# Altium PCB WX0.012.610PCB-4.2.PcbDoc (part 2 of 2)
Units mm, origin at the board's own origin, x right, y up, seen from the top; angles counter-clockwise.
Board outline 119 x 43 mm, 2 copper layers (Top Layer, Bottom Layer), stack 0.325 mm thick; 149 components, 114 nets, 503 pads, 393 vias.
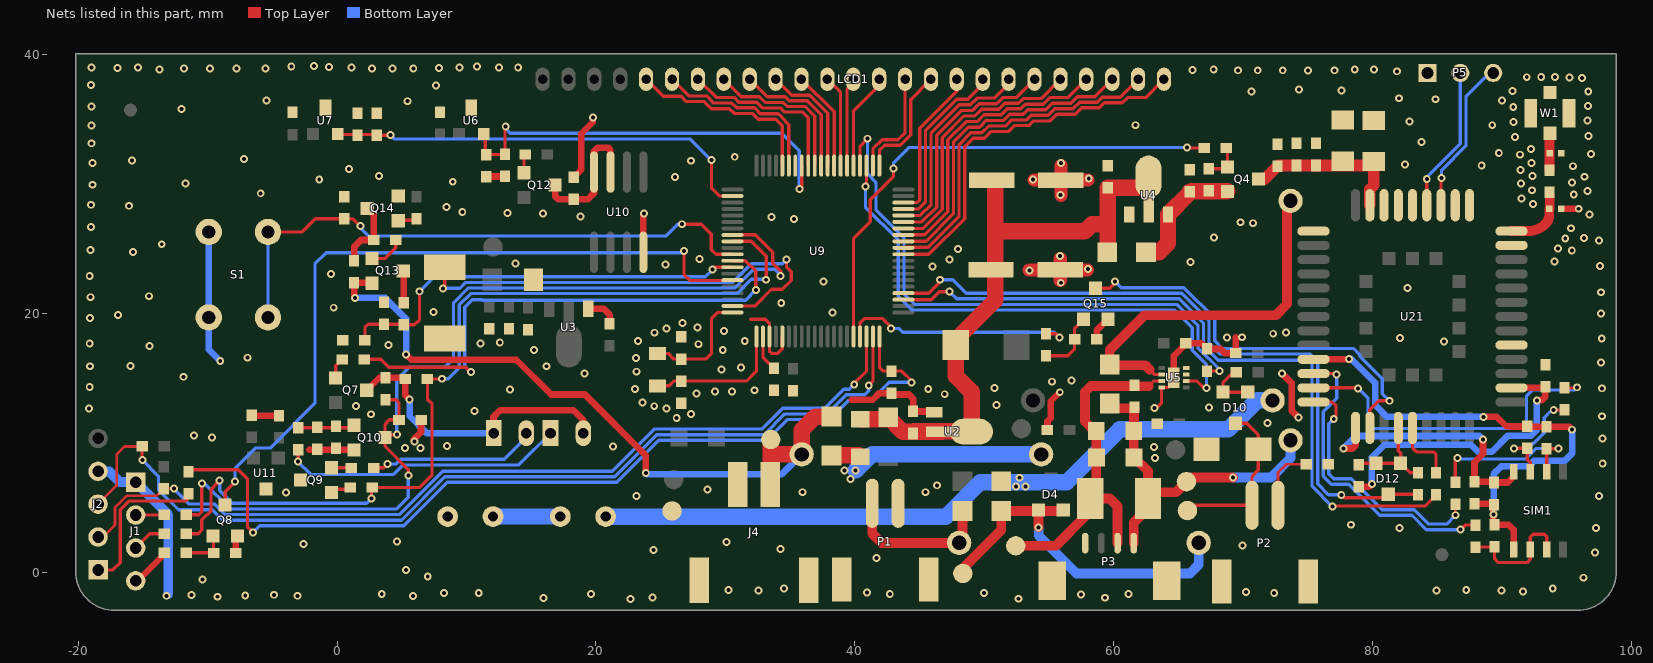
[diagram p2: the nets of this part, all layers, seen from the top]

## Via types
v1: diameter 0.61, hole 0.305, Top Layer to Bottom Layer, tented both sides, 393 vias

## Nets (pads, with @x,y where several pads share a name; then routed paths per layer and width w, separated by ;. In a path a pad name is that pad's centre, name@x,y a point inside that pad or via, vN(x,y) a via of type N, cw(c..) or ccw(c..) an arc to the next point about the centre after c; other vN are vias at no path point) (continued)
GND: C1.1 C2.1 C3.2 C4.2 C5.2 C7.2 C8.2 C9.2 C10.2 C14.2 C16.2 C17.2 C18.2 C22.1 C23.1 C24.2 C25.2 C26.2 C27.2 C28.2 C29.2 C30.2 C31.2 C32.2 C36.2 C37.2 C38.2 C39.1 C40.2 C41.1 C42.2 C43.2 C44.2 C47.2 C48.2 C49.2 C50.2 C51.1 C54.2 C55.2 C56.2 C57.2 FB2.1 J1.1 J2.4 J4.2 J4.3 J4.4 P1.1 P1.3 P1.4 P2.3 P2.4 P3.1 P3.5 P3.6 P5.1 Q8.2 Q9.3 Q10.2 Q14.2 Q15.2 R38.1 R41.1 R56.2 R58.2 S1.2 S2.2 TP5.1 TVS2.1 U2.1 U3.1 U4.1 U5.4 U5.9 U6.3 U7.3 U9.63 U9.65 U10.4 U11.3 U21.1 U21.27 U21.34 U21.36 U21.37 U21.40 U21.41 W1.2 | length 92.1
  Top Layer w0.254: 31.966,19.558 33.084,19.558 33.398,19.244 U9.63@33.398,18.224 33.398,17.085 33.567,16.916 34.049,16.916 34.398,17.265 U9.65@34.398,18.224 ; v1(63.144,12.7) 63.276,12.7 63.693,13.117 U5.4@63.693,14.287 64.198,14.287 64.643,14.732 U5.9@64.643,15.037
  Top Layer w0.508: R38.1@-7.816,1.498 Q8.2@-7.816,2.691 ; C49.2@-6.559,12.109 C48.2@-4.491,12.109 ; -2.157,9.464 Q10.2@1.315,9.464 ; v1(5.994,10.109) 5.994,10.185 5.918,10.262 6.49,10.833 C26.2@6.49,11.786 ; C30.2@11.538,30.584 C50.2@12.982,30.584 ; C36.2@18.288,30.518 18.872,31.103 18.872,33.884 19.761,34.773 v1(19.761,35.128) ; U3.1@19.407,20.382 20.588,20.382 21.057,19.914 C3.2@21.057,19.215 ; U10.4@23.661,24.727 v1@23.661,27.571 ; 39.776,13.335 41.377,13.335 41.897,13.855 C43.2@42.824,13.855 42.824,13.741 44.171,13.741 44.501,13.411 C7.2@44.501,12.434 U2.1@46.053,12.434 ; C10.2@54.876,10.998 54.876,11.671 55.135,11.929 55.135,13.225 v1(55.829,13.919) ; R58.2@58.674,18.009 58.674,18.678 Q15.2@59.538,19.542 ; U5.9@64.643,15.037 64.643,16.739 65.57,17.665 C23.1@65.57,17.704 66.764,17.704 C22.1@67.208,17.259 68.263,17.259 68.58,16.942 C8.2@69.405,16.942 69.405,18.148 ; v1(73,15.367) 73.736,14.63 73.736,12.497 v1(74.27,11.963) ; 94.945,28.092 v1@95.936,28.092
  Top Layer w1.016: v1@53.467,23.368 C57.2@55.861,23.368 ; v1@53.848,30.302 C14.2@55.911,30.302 ; v1@55.861,22.549 C57.2@55.861,23.368 ; v1@55.861,24.238 C57.2@55.861,23.368 ; v1@55.911,29.114 C14.2@55.911,30.302 ; v1@55.911,31.426 C14.2@55.911,30.302 ; v1@57.963,23.368 C57.2@55.861,23.368 ; v1@57.988,30.302 C14.2@55.911,30.302
  Bottom Layer w0.508: S1.2@-9.901,26.301 -9.901,17.216 v1(-9.017,16.332)
  Bottom Layer w0.762: J2.4@-18.455,7.814 -17.618,7.814 -16.777,6.973 J1.1@-15.549,6.973 -13.03,4.454 v1@-13.03,-1.676
  other v1: 22.657,-2.057 52.629,-2.032 15.951,-1.981 59.334,-1.956 24.359,-1.93 -9.22,-1.88 5.867,-1.829 -13.157,-1.803 -3.048,-1.803 -7.087,-1.778 -11.252,-1.753 -4.877,-1.727 57.455,-1.702 19.609,-1.676 61.138,-1.676 3.454,-1.651 42.697,-1.651 10.947,-1.6 8.255,-1.575 49.962,-1.575 72.39,-1.575 40.945,-1.549 70.206,-1.524 91.592,-1.473 32.563,-1.397 84.938,-1.397 89.941,-1.397 87.224,-1.372 30.226,-1.346 34.519,-1.245 93.904,-1.245 -10.389,-0.533 96.291,-0.406 7.01,-0.305 5.334,0.178 41.681,1.118 97.18,1.549 24.435,1.727 34.248,1.81 69.952,2.083 -2.591,2.21 30.074,2.362 4.648,2.388 82.067,3.429 97.257,3.429 78.334,3.683 23.139,5.918 97.485,5.918 -3.937,6.172 35.966,6.198 45.441,6.198 28.626,6.401 46.355,6.731 97.765,8.407 63.17,8.839 6.452,9.601 5.258,9.627 63.119,9.677 21.311,9.728 8.509,9.754 97.739,10.338 -9.652,10.414 -11.049,10.566 71.882,11.557 26.238,11.938 97.714,12.065 2.616,12.217 27.356,12.243 10.617,12.471 -19.152,12.649 25.453,12.675 67.361,12.751 1.473,12.852 24.503,12.84 50.952,12.929 23.597,13.132 46.939,13.767 27.762,13.818 29.185,13.97 30.505,13.97 32.233,14.072 13.36,14.122 23.021,14.179 45.669,14.173 97.714,14.224 50.8,14.249 -19.101,14.326 55.22,14.732 56.718,14.834 -11.862,15.113 19.126,15.367 23.135,15.504 29.693,15.672 31.217,15.824 -19.075,15.926 16.18,15.926 -15.951,15.951 97.638,16.205 23.092,16.558 -6.909,16.586 15.215,17.17 29.794,17.17 -14.478,17.501 3.962,17.577 27.915,17.628 -19.101,17.678 11.074,17.678 12.573,17.755 85.496,17.831 23.249,17.883 31.496,17.882 97.688,18.059 82.093,18.11 68.758,18.136 69.91,18.167 72.314,18.44 24.536,18.517 73.304,18.542 29.896,18.644 25.451,18.847 27.838,18.923 26.695,19.253 -19.075,19.66 -16.916,19.888 97.638,20.015 38.278,20.066 7.468,20.117 -0.254,20.447 34.315,20.803 -19.05,21.26 -14.529,21.336 97.638,21.641 82.677,21.971 55.905,22.377 37.592,22.479 -19.101,22.911 -0.457,23.038 53.492,23.317 58.014,23.444 45.999,23.622 97.561,23.673 25.375,23.774 13.792,23.851 65.938,23.978 94.031,24.019 47.295,24.181 27.991,24.206 55.855,24.435 -15.748,24.765 95.377,24.857 -19.05,24.917 47.981,24.994 94.31,25.035 -13.538,25.349 97.485,25.654 94.869,25.797 96.317,25.822 67.742,25.883 95.301,26.584 -18.999,26.67 70.764,26.975 69.799,27.051 35.306,27.305 33.553,27.457 18.796,27.483 96.749,27.643 15.9,27.711 23.698,27.711 13.183,27.762 9.677,27.838 95.91,28.092 8.458,28.219 -16.053,28.321 -18.999,28.397 92.38,28.456 91.491,28.888 55.88,29.159 95.529,29.192 -5.893,29.286 96.596,29.472 92.304,29.523 -18.898,29.947 -11.709,30.048 91.44,30.031 95.402,30.132 8.941,30.175 -1.372,30.353 53.746,30.353 58.064,30.429 26.111,30.556 96.368,30.564 3.251,30.632 92.329,30.615 91.415,31.097 0.94,31.166 95.479,31.377 88.417,31.42 82.499,31.496 -18.872,31.623 55.931,31.623 92.253,31.631 27.344,31.801 -15.85,31.826 -7.188,31.928 30.722,32.106 91.389,32.266 96.85,32.317 89.738,32.41 92.227,32.698 -18.948,33.147 83.769,33.249 90.983,33.637 96.672,33.714 -18.948,34.519 61.671,34.544 89.23,34.544 90.881,34.78 82.829,34.823 96.596,34.907 -12.014,35.789 90.856,35.949 -18.974,35.992 96.622,36.025 5.436,36.398 -5.436,36.449 89.992,36.449 84.861,36.551 82.017,36.627 70.637,37.135 96.647,37.143 77.597,37.211 90.805,37.193 74.295,37.313 7.645,37.617 -18.999,37.643 96.164,38.202 95.199,38.227 91.897,38.252 93.015,38.278 94.082,38.278 81.89,38.71 75.006,38.76 69.596,38.786 71.12,38.786 73.05,38.786 77.038,38.786 66.065,38.811 -13.716,38.837 67.716,38.837 78.613,38.837 80.112,38.837 -11.811,38.913 -5.537,38.913 2.718,38.913 4.293,38.913 5.893,38.913 -9.804,38.938 -7.772,38.938 -16.967,38.964 7.874,38.964 -15.367,38.989 1.118,38.989 9.449,38.989 13.995,38.989 -18.948,39.014 12.522,39.014 -0.61,39.04 -3.531,39.065 10.82,39.065 -1.778,39.116
GPRS_3.6V: C9.1 C16.1 C17.1 C18.1 C37.1 Q4.3 U21.42 U21.43 | length 12.5
  Top Layer w0.889: Q4.3@71.177,30.378 71.64,30.378 C16.1@72.644,31.382 72.695,31.433 C17.1@74.117,31.433 C18.1@75.616,31.433 C9.1@79.736,31.433 ; U21.43@79.774,28.361 79.774,29.584 80.086,29.896 C9.1@80.086,31.783
GPRS_POWER: R18.1 U9.76 | length 39.1
  Top Layer w0.254: U9.76@39.898,18.224 39.898,25.801 41.199,27.102 41.199,28.804 42.977,30.582 v1@42.977,31.14 ; v1@65.659,32.791 R18.1@66.98,32.791
  Bottom Layer w0.254: v1(42.977,31.191) 42.977,31.623 44.171,32.817 v1(65.659,32.817)
GPRS_RST: R57.1 U9.77 | length 18.4
  Top Layer w0.254: U9.77@40.398,18.224 40.398,19.277 40.73,19.609 42.139,19.609 42.799,18.948 v1(42.799,18.847) ; R57.1@54.762,18.44 55.499,18.44 v1(55.804,18.136)
  Bottom Layer w0.254: v1(42.799,18.847) 43.408,18.847 43.712,18.542 55.397,18.542 v1(55.804,18.136)
HALL1_INTP6: C29.1 C56.1 U7.2 U9.42 | length 33.6
  Top Layer w0.254: U7.2@0.112,33.831 C56.1@3.002,33.831 ; C56.1@3.065,33.768 v1@4.18,33.768 ; v1(28.918,31.852) 28.918,29.718 29.563,29.074 U9.42@30.548,29.074
  Bottom Layer w0.254: v1(4.147,33.792) 4.461,33.477 27.293,33.477 v1(28.918,31.852)
HALL2_INTP7: C30.1 C50.1 U6.2 U9.33 | length 33.5
  Top Layer w0.254: U6.2@11.454,33.86 11.454,32.358 11.526,32.286 C50.1@12.982,32.286 v1@12.982,34.394 ; v1(35.712,29.616) 35.898,29.802 U9.33@35.898,31.424
  Bottom Layer w0.254: v1(13.03,34.442) 13.03,34.29 13.386,33.934 34.341,33.934 35.712,32.563 v1(35.712,29.616)
IRDA_CTL: R27.1 U9.52 | length 40.5
  Top Layer w0.254: R27.1@2.095,16.459 3.378,16.459 3.988,15.85 9.957,15.85 v1(10.338,15.469) ; U9.52@30.548,24.074 31.547,24.074 32.334,23.286 32.334,21.838 v1(32.35,21.822)
  Bottom Layer w0.254: v1(10.338,15.469) 9.868,15.938 9.868,20.482 10.443,21.057 11.208,21.057 11.234,21.031 31.559,21.031 v1(32.35,21.822)
IRDA_POW: D5.1 D6.2 Q7.3 R29.1 R34.2 | length 23.1
  Top Layer w0.508: Q7.3@2.292,14.072 3.257,15.037 R29.1@3.734,15.037 R34.2@5.182,15.037 ; R34.2@5.182,14.935 R34.2@5.283,14.935 5.283,13.691 v1(5.613,13.36) ; D5.1@12.09,10.759 12.09,12.014 12.598,12.522 18.263,12.522 19.03,11.755 D6.2@19.03,10.759
  Bottom Layer w0.508: v1(5.613,13.36) 5.613,12.065 6.919,10.759 D5.1@12.09,10.759
IRDA_RXD1: C26.1 Q10.3 R29.2 R37.2 U9.48 | length 77.4
  Top Layer w0.254: R37.2@-11.631,4.45 -10.663,4.45 -10.439,4.674 v1(-10.439,6.883) ; R29.2@3.734,13.335 4.572,13.335 4.788,13.119 C26.1@4.788,11.786 4.039,11.786 3.715,11.462 Q10.3@3.715,10.414 3.715,9.728 5.512,7.931 v1(5.512,7.493) ; Q10.3@3.943,10.643 v1(4.623,10.643) ; U9.48@30.548,26.074 32.295,26.074 33.655,24.714 33.655,23.876 34.265,23.266 v1(34.265,22.885)
  Bottom Layer w0.254: v1(-10.439,6.883) -10.237,6.883 -8.256,4.902 4.623,4.902 5.512,5.791 v1(5.512,7.493) ; v1(4.623,10.643) 4.623,14.884 5.613,15.875 8.357,15.875 9.004,16.523 9.004,20.84 10.136,21.971 30.739,21.971 32.186,23.419 33.807,23.419 34.265,22.962 v1(34.265,22.885)
IRDA_TXD1: R34.1 R36.2 R40.1 U9.49 | length 69
  Top Layer w0.254: R36.2@-11.631,2.986 -10.73,2.986 -10.439,3.277 -10.439,4.063 -9.728,4.774 -9.728,6.426 v1@-9.195,6.96 ; v1(2.667,5.715) R40.1@2.667,6.502 ; R40.1@2.718,6.553 6.35,6.553 7.341,7.544 7.341,13.03 6.985,13.386 R34.1@6.985,14.935 v1@8.077,14.935 ; U9.49@30.548,25.574 32.004,25.574 33.147,24.431 v1(33.147,22.606)
  Bottom Layer w0.254: v1(-9.068,7.112) -9.068,6.325 -8.077,5.334 2.286,5.334 v1(2.667,5.715) ; v1(8.103,14.961) 8.585,14.961 9.436,15.811 9.436,20.661 10.315,21.539 30.917,21.539 32.013,22.635 33.118,22.635 v1(33.147,22.606)
KEY_INTP0: C31.1 S1.1 U9.51 | length 46.3
  Top Layer w0.254: S1.1@-5.334,26.302 -2.679,26.302 -1.663,27.318 1.041,27.318 ; C31.1@0.559,27.305 1.219,27.305 1.753,26.772 v1(1.803,26.772) ; v1(26.645,26.899) 28.143,26.899 28.905,26.137 28.905,24.943 29.274,24.574 U9.51@30.548,24.574
  Bottom Layer w0.254: S1.1@-5.329,19.697 S1.1@-5.329,26.301 ; v1(1.803,26.772) 1.651,26.772 2.438,25.984 25.4,25.984 26.314,26.899 v1(26.645,26.899)
MCU_RXD0: R13.1 U9.3 | length 55.4
  Top Layer w0.254: U9.3@43.748,21.074 45.898,21.074 46.516,21.692 v1(47.295,21.692) ; v1@76.733,5.08 v1(76.886,5.08) ; v1@76.886,5.131 84.049,5.131 84.887,5.969 R13.1@84.887,5.994
  Bottom Layer w0.254: v1(47.295,21.692) 47.854,21.133 65.059,21.133 66.929,19.263 66.929,17.53 68.076,16.383 75.056,16.383 75.311,16.128 75.311,6.655 v1(76.886,5.08)
MCU_TXD0: D12.3 R12.2 U9.4 | length 53.9
  Top Layer w0.254: U9.4@43.748,21.574 45.72,21.574 46.584,22.437 v1(46.584,22.606) ; v1(77.572,5.994) 77.8,5.766 80.931,5.766 D12.3@81.204,6.039 R12.2@83.445,6.039
  Bottom Layer w0.254: v1(46.584,22.606) 47.574,22.606 48.616,21.565 65.238,21.565 67.361,19.442 67.361,17.709 68.204,16.866 75.184,16.866 75.743,16.307 75.743,6.834 76.582,5.994 v1(77.572,5.994)
NB_DBG_RXD: P5.3 U21.38 | length 12
  Top Layer w0.254: U21.38@85.274,28.361 v1@85.274,30.435
  Bottom Layer w0.254: v1(85.319,30.48) 85.319,31.063 87.198,32.943 87.198,36.754 89.027,38.583 P5.3@89.306,38.583
NB_DBG_TXD: P5.2 U21.39 | length 11.3
  Top Layer w0.254: U21.39@84.174,28.361 84.174,30.402 v1(84.176,30.404)
  Bottom Layer w0.254: v1(84.176,30.404) 84.176,30.531 86.766,33.122 P5.2@86.766,38.583
NB_RXD: D12.1 D12.2 R12.1 R106.2 U21.17 | length 7.5
  Top Layer w0.254: R106.2@79.051,8.439 D12.2@80.254,8.439 D12.1@82.154,8.439 ; U21.17@81.974,11.161 81.974,9.39 82.154,9.21 D12.1@82.154,8.439 ; R12.1@83.49,7.696 82.897,7.696 D12.1@82.154,8.439
NB_TXD: R13.2 U21.18 | length 5
  Top Layer w0.254: U21.18@83.074,11.161 83.074,9.611 83.388,9.296 84.734,9.296 84.887,9.144 R13.2@84.887,7.696
Net119_1: 119.1 D10.3 P2.2 TVS2.2 | length 12.2
  Top Layer w0.254: 119.1@66.247,5.185 P2.2@70.679,5.185 70.679,7.433 71.164,7.918 TVS2.2@71.164,9.525 71.164,10.624 70.263,11.525 D10.3@69.393,11.525
NetB_1: B.1 C58.1 D20.1 D21.1 P3.3 TVS1.2 U5.3 | length 27.6
  Top Layer w0.254: 62.687,14.376 63.098,14.787 U5.3@63.693,14.787
  Top Layer w0.762: B.1@52.426,2.057 55.524,2.057 57.789,4.322 57.789,5.313 TVS1.2@58.191,5.715 59.69,5.715 60.289,5.116 P3.3@60.289,2.261 ; TVS1.2@58.646,6.124 D20.1@58.646,10.77 ; D20.1@58.646,10.922 D20.1@58.646,10.77 ; D20.1@58.672,10.744 D20.1@58.646,10.77 ; C58.1@61.595,14.389 58.229,14.389 57.766,13.925 57.766,11.65 D20.1@58.646,10.77 ; C58.1@61.697,14.376 62.687,14.376
NetC1_2: C1.2 R2.1 U21.35 | length 5.1
  Top Layer w0.762: U21.35@90.724,26.361 91.986,26.361 ccw(c91.986,28.283) 93.345,26.924 ccw(c92.655,27.614) 93.631,27.614 C1.2@93.631,28.092 ; C1.2@93.669,28.049 R2.1@93.669,29.168
NetC2_2: C2.2 R2.2 W1.1 | length 2.3
  Top Layer w0.762: R2.2@93.662,31.073 W1.1@93.662,33.401
NetC6_1: C6.1 R85.1 R86.1 | length 55.2
  Bottom Layer w1.27: C6.1@20.776,4.293 47.015,4.293 49.682,6.96 56.363,6.96 60.452,11.049 68.834,11.049 71.069,13.284 R85.1@72.263,13.284
  other v1: 52.451,6.629 53.188,6.629 52.705,7.315
NetC6_2: C6.2 C44.1 | length 5.2
  Bottom Layer w1.27: C44.1@12.05,4.319 C6.2@17.25,4.319
NetC32_1: C32.1 Q10.1 R39.1 R41.2 | length 4.1
  Top Layer w0.254: R39.1@-2.997,11.176 Q10.1@1.127,11.176
NetC36_1: C36.1 Q12.3 U10.7 U10.8 | length 10.6
  Top Layer w0.508: Q12.3@16.846,29.921 16.846,29.077 17.107,28.817 C36.1@18.288,28.817 19.368,28.817 19.851,29.299 U10.8@19.851,30.927 19.851,32.525 20.142,32.817 20.93,32.817 21.121,32.626 U10.7@21.121,30.927
NetC38_1: C38.1 U9.62 | length 2.8
  Top Layer w0.254: U9.62@32.898,18.224 32.898,16.632 C38.1@33.744,15.786
NetC40_1: C40.1 Q4.2 R16.2 R50.2 U4.3 | length 9.6
  Top Layer w1.27: R50.2@62.487,24.74 63.5,24.74 64.187,25.427 U4.3@64.187,27.65 C40.1@65.862,29.325 ; C40.1@65.862,29.401 C40.1@65.862,29.325 ; Q4.2@68.777,29.428 65.966,29.428 C40.1@65.862,29.325
NetC58_2: C58.2 D20.2 D21.2 P3.4 R83.2 R87.1 R.1 TVS1.1 | length 26.6
  Top Layer w0.762: R87.1@59.932,12.687 C58.2@61.595,12.687 ; P3.4@61.539,2.261 61.539,3.856 62.636,4.953 TVS1.1@62.636,5.715 TVS1.1@62.636,6.198 ; D21.2@61.546,8.89 D20.2@61.546,10.922 ; D21.2@61.572,8.89 62.636,7.825 TVS1.1@62.636,6.198 ; D20.2@61.572,10.744 C58.2@61.572,12.664 ; v1(69.215,7.341) 66.04,7.341 65.608,6.909 65.507,6.909 64.795,6.198 TVS1.1@62.636,6.198
  Bottom Layer w0.762: v1(69.215,7.341) 72.161,7.341 73.651,8.83 R83.2@73.651,10.202
NetD2_1: D2.1 R80.2 R81.2 | length 17
  Top Layer w1.27: R81.2@38.202,9.04 D2.1@40.31,9.04
  Bottom Layer w1.27: v1(40.056,7.874) 41.326,9.144 51.47,9.144 51.496,9.119 R80.2@54.39,9.119
  other v1: 39.649,7.214 39.192,7.874
NetD4_1: D4.1 D4.2 R84.2 R88.2 TP7.1 | length 28.3
  Top Layer w0.762: TP7.1@48.336,-0.076 48.336,0.305 51.311,3.279 R88.2@51.311,4.75 D4.1@54.193,4.75 ; v1@54.193,3.49 D4.1@54.193,4.75 ; D4.1@54.193,4.82 D4.1@54.193,4.75 ; D4.2@56.023,4.75 D4.1@54.193,4.75
  Bottom Layer w0.762: v1(54.199,3.485) 54.199,2.85 57.125,-0.076 65.888,-0.076 66.557,0.593 R84.2@66.557,2.286
NetD5_2: D5.2 R35.2 | length 13.1
  Top Layer w0.254: R35.2@2.819,8.077 3.607,8.077 v1(3.912,8.382)
  Bottom Layer w0.254: v1(3.912,8.382) 4.572,8.382 4.928,8.738 12.929,8.738 14.63,10.439 D5.2@14.63,10.759
NetD6_1: D6.1 R39.2 | length 22
  Top Layer w0.254: v1@-2.997,8.687 R39.2@-2.997,9.474
  Bottom Layer w0.254: v1(-3.023,8.56) -2.032,7.569 4.37,7.569 5.106,8.306 14.037,8.306 D6.1@16.49,10.759
NetD10_1: D10.1 D10.2 FB1.2 | length 4
  Top Layer w0.254: FB1.2@69.444,15.469 69.221,15.469 68.443,14.69 D10.2@68.443,13.925 D10.1@70.343,13.925
NetFB2_2: FB2.2 P2.1 | length 5
  Top Layer w0.203: P2.1@72.679,5.185 72.679,7.706 73.33,8.357 FB2.2@74.879,8.357
NetJ1_2: J1.2 R37.1 | length 2.2
  Top Layer w0.254: J1.2@-15.549,4.433 R37.1@-13.35,4.433
NetJ1_3: J1.3 R36.1 | length 2.7
  Top Layer w0.254: J1.3@-15.549,1.893 -14.456,2.986 R36.1@-13.333,2.986
NetJ1_4: J1.4 R31.1 | length 5.8
  Top Layer w0.254: J1.4@-15.549,-0.647 -13.384,1.518 R31.1@-13.35,1.518 ; J1.4@-15.242,-0.647 R31.1@-13.35,1.245
NetJ2_1: J2.1 R1.2 | length 12.1
  Top Layer w0.254: J2.1@-18.455,0.194 -17.307,0.194 -16.739,0.762 -16.739,4.851 -16.078,5.512 -11.735,5.512 R1.2@-11.201,6.045
NetP1_2: P1.2 R84.1 R88.1 | length 11.6
  Top Layer w0.762: P1.2@41.342,5.338 41.342,3.007 42.062,2.286 R84.1@48.057,2.286 ; R84.1@48.311,2.54 R88.1@48.311,4.75
NetQ4_1: Q4.1 R16.1 R18.2 | length 2.8
  Top Layer w0.254: R16.1@67.335,31.191 68.64,31.191 Q4.1@68.777,31.328 68.783,31.335 R18.2@68.783,32.664
NetQ7_1: Q7.1 R27.2 | length 1.6
  Top Layer w0.254: Q7.1@-0.108,15.022 -0.108,15.958 R27.2@0.394,16.459
NetQ8_1: Q8.1 R31.2 R38.2 | length 3.4
  Top Layer w0.254: R31.2@-11.648,1.518 R38.2@-9.539,1.518 ; Q8.1@-9.591,2.544 -9.539,2.492 R38.2@-9.539,1.245
NetQ9_1: Q9.1 R40.2 | length 1
  Top Layer w0.254: Q9.1@0.006,6.416 R40.2@1.031,6.416
NetQ9_2: Q9.2 R35.1 | length 1.5
  Top Layer w0.254: Q9.2@-0.426,8.087 R35.1@1.107,8.087
NetQ12_1: Q12.1 R49.2 | length 1.3
  Top Layer w0.254: Q12.1@14.446,30.871 R49.2@14.446,32.201
NetQ13_1: Q13.1 R55.2 | length 2.8
  Top Layer w0.254: Q13.1@2.712,24.242 3.693,24.242 4.547,25.095 R55.2@4.547,25.679
NetQ13_3: Q13.3 R9.1 | length 2.4
  Top Layer w0.508: R9.1@5.156,20.828 Q13.3@5.156,23.247
NetQ14_1: Q14.1 R14.2 | length 1.3
  Top Layer w0.254: Q14.1@4.477,27.193 R14.2@5.756,27.193
NetQ14_3: Q14.3 R10.1 R55.1 | length 5.5
  Top Layer w0.508: R10.1@1.321,24.079 1.321,25.146 1.854,25.679 R55.1@2.845,25.679 2.845,27.604 Q14.3@2.331,28.118
NetQ15_1: Q15.1 R57.2 R58.1 | length 4.8
  Top Layer w0.254: R57.2@54.991,16.739 56.439,16.739 56.972,17.272 R58.1@56.972,18.009 56.972,18.876 Q15.1@57.648,19.552
NetR83_1: R83.1 R87.2 U5.2 | length 28.6
  Top Layer w0.254: 62.763,15.672 63.148,15.287 U5.2@63.693,15.287
  Top Layer w0.762: R87.2@59.766,15.929 59.69,15.929 59.69,17.17 62.382,19.863 72.517,19.863 73.381,20.726 R83.1@73.381,28.432 ; R87.2@59.766,16.005 62.43,16.005 62.763,15.672
  Bottom Layer w0.762: R83.1@73.533,28.584 R83.1@73.651,28.702
OPEN: U5.6 U9.23 | length 41.5
  Top Layer w0.254: v1@40.898,29.9 U9.23@40.898,31.424 ; U5.6@65.593,14.787 66.417,14.787 v1@66.954,14.249
  Bottom Layer w0.254: v1(40.818,29.82) 40.818,28.219 43.358,25.679 43.358,21.339 44.428,20.269 64.701,20.269 66.065,18.905 66.065,17.173 67.158,16.08 v1(67.158,14.249)
RESET_N: Q15.3 U21.15 | length 31.7
  Top Layer w0.254: Q15.3@58.598,21.952 59.671,21.952 v1@60.096,22.377 ; U21.15@79.774,11.161 79.774,12.566 80.467,13.259 v1(81.305,13.259)
  Bottom Layer w0.254: v1(60.096,22.479) 60.579,21.996 65.417,21.996 67.793,19.621 67.793,17.888 68.383,17.297 78.518,17.297 78.994,16.821 78.994,16.713 80.747,14.961 80.747,13.818 v1(81.305,13.259)
RST: C43.1 R1.1 U9.80 | length 70.4
  Top Layer w0.254: R1.1@-11.481,7.772 -11.481,7.925 -7.639,7.925 -6.909,7.195 -6.909,3.505 v1(-6.477,3.073) ; U9.80@41.898,18.224 41.898,15.862 42.202,15.557 C43.1@42.824,15.557 43.612,15.557 44.374,14.795 v1(44.374,14.681)
  Bottom Layer w0.254: v1(-6.477,3.073) -6.477,3.099 -5.969,3.607 5.159,3.607 8.512,6.96 21.615,6.96 24.867,10.211 33.175,10.211 34.775,11.811 38.042,11.811 39.515,13.284 41.25,13.284 42.647,14.681 v1(44.374,14.681)
RXD1: U9.34
S0: LCD1.5 U9.36 | length 15.1
  Top Layer w0.254: LCD1.5@23.877,38.094 25.198,36.773 26.587,36.773 26.988,36.373 28.377,36.373 28.923,35.826 30.313,35.826 30.684,35.455 32.074,35.455 32.521,35.007 33.911,35.007 33.911,34.973 34.398,34.486 U9.36@34.398,31.424
S1: LCD1.6 U9.35 | length 13.7
  Top Layer w0.254: LCD1.6@25.877,38.094 27.166,36.805 28.556,36.805 29.102,36.258 30.491,36.258 30.863,35.887 32.252,35.887 32.7,35.439 34.09,35.439 34.342,35.186 34.342,35.152 34.898,34.596 U9.35@34.898,31.424
S2: LCD1.7 U9.32 | length 13.5
  Top Layer w0.254: LCD1.7@27.877,38.094 29.281,36.69 30.67,36.69 31.042,36.318 32.431,36.318 32.879,35.871 34.268,35.871 34.579,35.56 35.966,35.56 36.398,35.128 U9.32@36.398,31.424
S3: LCD1.8 U9.31 | length 12
  Top Layer w0.254: LCD1.8@29.877,38.094 31.221,36.75 32.61,36.75 33.058,36.302 34.447,36.302 34.758,35.992 36.147,35.992 36.898,35.241 U9.31@36.898,31.424
S4: LCD1.9 U9.30 | length 10.4
  Top Layer w0.254: LCD1.9@31.877,38.094 33.237,36.734 34.626,36.734 34.937,36.424 ; 35.077,36.424 36.326,36.424 37.398,35.352 U9.30@37.398,31.424
S5: LCD1.10 U9.29 | length 9.2
  Top Layer w0.254: LCD1.10@33.877,38.094 35.116,36.855 36.505,36.855 37.898,35.462 U9.29@37.898,31.424
S6: LCD1.11 U9.28 | length 7.7
  Top Layer w0.254: LCD1.11@35.877,38.094 38.398,35.573 U9.28@38.398,31.424
S7: LCD1.12 U9.27 | length 7.1
  Top Layer w0.254: LCD1.12@37.877,38.094 38.898,37.073 U9.27@38.898,31.424
S8: LCD1.13 U9.26 | length 6.9
  Top Layer w0.254: U9.26@39.398,31.424 39.398,37.342 39.877,37.821 LCD1.13@39.877,38.094
S9: LCD1.14 U9.25 | length 7.5
  Top Layer w0.254: U9.25@39.898,31.424 39.898,35.664 41.877,37.643 LCD1.14@41.877,38.094
S10: LCD1.15 U9.22 | length 8.7
  Top Layer w0.254: U9.22@41.398,31.424 41.398,32.712 42.112,33.426 43.332,33.426 43.877,33.971 LCD1.15@43.877,38.094 LCD1.15@44.168,38.094
S11: LCD1.16 U9.21 | length 9.1
  Top Layer w0.254: U9.21@41.898,31.424 41.898,32.602 42.291,32.995 43.511,32.995 44.308,33.792 44.308,36.526 LCD1.16@45.877,38.094 LCD1.16@45.898,38.073
S12: LCD1.17 U9.18 | length 11.7
  Top Layer w0.254: U9.18@43.748,28.574 44.835,28.574 45.022,28.761 45.022,34.303 47.877,37.158 LCD1.17@47.877,37.894
S13: LCD1.18 U9.17 | length 13.4
  Top Layer w0.254: U9.17@43.748,28.074 44.945,28.074 45.454,28.582 45.454,34.124 47.88,36.551 48.734,36.551 LCD1.18@49.877,37.694
S14: LCD1.19 U9.16 | length 15.9
  Top Layer w0.254: U9.16@43.748,27.574 45.056,27.574 45.886,28.404 45.886,33.945 48.059,36.119 48.912,36.119 49.437,36.643 50.768,36.643 51.877,37.752 LCD1.19@51.877,38.094
S15: LCD1.20 U9.15 | length 17.9
  Top Layer w0.254: U9.15@43.748,27.074 45.167,27.074 46.317,28.225 46.317,33.767 48.238,35.687 49.091,35.687 49.616,36.212 50.947,36.212 51.413,36.678 52.46,36.678 LCD1.20@53.877,38.094
S16: LCD1.21 U9.14 | length 20.1
  Top Layer w0.254: U9.14@43.748,26.574 45.277,26.574 46.749,28.046 46.749,33.588 48.417,35.255 49.27,35.255 49.795,35.78 51.125,35.78 51.591,36.246 52.639,36.246 52.994,36.601 54.384,36.601 LCD1.21@55.877,38.094
S17: LCD1.22 U9.13 | length 22.4
  Top Layer w0.254: U9.13@43.748,26.074 45.388,26.074 47.181,27.867 47.181,33.409 48.595,34.823 49.449,34.823 49.974,35.348 51.304,35.348 51.77,35.814 52.818,35.814 53.173,36.17 54.562,36.17 55.07,36.678 56.46,36.678 LCD1.22@57.877,38.094
S18: LCD1.23 U9.12 | length 24.6
  Top Layer w0.254: U9.12@43.748,25.574 45.498,25.574 47.613,27.688 47.613,33.23 48.774,34.392 49.628,34.392 50.153,34.916 51.483,34.916 51.949,35.382 52.996,35.382 53.352,35.738 54.741,35.738 55.249,36.246 56.667,36.246 57.175,36.754 58.536,36.754 LCD1.23@59.877,38.094
S19: LCD1.24 U9.11 | length 26.8
  Top Layer w0.254: U9.11@43.748,25.074 43.793,25.119 45.654,25.119 48.045,27.509 48.045,33.051 48.953,33.96 49.807,33.96 50.331,34.484 51.662,34.484 52.128,34.95 53.264,34.95 53.619,35.306 54.92,35.306 55.428,35.814 56.846,35.814 57.354,36.322 58.715,36.322 59.096,36.703 60.485,36.703 LCD1.24@61.877,38.094
S20: LCD1.25 U9.10 | length 29
  Top Layer w0.254: U9.10@43.748,24.574 45.72,24.574 48.476,27.33 48.476,32.872 49.132,33.528 49.986,33.528 50.51,34.053 51.841,34.053 52.307,34.519 53.443,34.519 53.798,34.874 55.099,34.874 55.607,35.382 57.025,35.382 57.533,35.89 58.894,35.89 59.275,36.271 60.664,36.271 61.07,36.678 62.46,36.678 LCD1.25@63.877,38.094
SET: Q8.3 U9.55 | length 56.9
  Top Layer w0.254: Q8.3@-8.641,5.217 -8.641,6.244 v1(-7.874,7.01) ; v1(26.797,24.841) 26.797,23.012 27.254,22.555 30.529,22.555 U9.55@30.548,22.574
  Bottom Layer w0.254: v1(-7.874,7.01) -7.874,8.052 -6.321,9.605 -5.162,9.605 -1.702,13.066 -1.702,23.825 -0.838,24.689 26.645,24.689 v1(26.797,24.841)
SIM_CLK: C20.1 R5.1 SIM1.6 | length 12.8
  Top Layer w0.254: R5.1@86.373,6.972 R5.1@86.385,6.96 ; R5.1@86.385,6.985 86.385,8.661 v1(86.563,8.839) ; C20.1@93.412,9.563 v1@94.349,9.563 ; SIM1.6@93.436,7.772 C20.1@93.436,9.539
  Bottom Layer w0.254: v1(86.563,8.839) 86.639,8.763 91.821,8.763 92.634,9.576 v1(94.336,9.576)
SIM_DATA: C21.1 R4.2 SIM1.2 SIM1.3 | length 9.3
  Top Layer w0.254: R4.2@87.948,1.969 C21.1@89.408,1.969 89.408,1.067 89.713,0.762 91.923,0.762 92.166,1.005 92.166,2.732 92.38,2.946 93.243,2.946 93.436,2.754 SIM1.3@93.436,1.95
SIM_RST: C19.1 R6.1 SIM1.7 | length 8.7
  Top Layer w0.254: v1@90.97,9.589 C19.1@91.939,9.589 91.939,8.722 92.166,8.494 SIM1.7@92.166,7.772 ; v1@93.955,12.548 v1(93.98,12.548) R6.1@94.818,12.548
  Bottom Layer w0.254: v1(90.907,9.576) 92.023,9.576 92.455,10.008 92.459,10.008 93.243,10.792 93.243,11.963 93.828,12.548 v1(93.98,12.548)
SLEEP: C22.2 U5.7 U5.8 U9.24 | length 44.3
  Top Layer w0.254: U9.24@40.398,31.424 40.398,32.93 v1(40.97,33.503) ; C22.2@67.208,15.557 v1@68.136,15.557
  Bottom Layer w0.254: v1(40.97,33.503) 40.97,30.817 41.631,30.156 41.631,28.017 43.79,25.858 43.79,21.518 44.607,20.701 64.88,20.701 66.497,19.084 66.497,17.351 v1@68.174,15.675 ; v1@68.109,15.61 68.148,15.57 v1(68.174,15.57)
SWCLK: J2.2 R11.2 U9.78 | length 69.8
  Top Layer w0.203: J2.2@-18.455,2.734 -18.094,2.734 -17.145,3.683 -17.145,5.02 -16.247,5.918 -13.945,5.918 R11.2@-13.386,6.477 v1(-12.598,6.477)
  Top Layer w0.254: v1(39.954,14.529) 39.954,14.605 40.898,15.549 U9.78@40.898,18.224
  Bottom Layer w0.254: v1(-12.598,6.477) -11.405,5.283 -9.45,5.283 -8.637,4.47 4.802,4.47 8.154,7.823 21.258,7.823 24.509,11.074 32.817,11.074 34.417,12.675 37.684,12.675 39.157,14.148 39.573,14.148 v1(39.954,14.529)
SWIO: J2.3 R8.2 U9.79 | length 74.7
  Top Layer w0.203: J2.3@-18.455,5.274 -17.018,6.711 -17.018,9.119 -16.408,9.728 R8.2@-15.062,9.728
  Top Layer w0.254: v1@-15.062,8.788 -15.062,9.728 R8.2@-15.062,9.754 ; v1(41.072,14.453) 41.398,14.779 U9.79@41.398,18.224
  Bottom Layer w0.254: v1(-15.037,8.687) -13.792,7.442 -13.792,6.401 -12.243,4.851 -9.629,4.851 -8.816,4.039 4.981,4.039 8.333,7.391 21.437,7.391 24.688,10.643 32.996,10.643 34.596,12.243 37.863,12.243 39.336,13.716 40.767,13.716 41.072,14.021 v1(41.072,14.453)
USIM_CLK: R5.2 U21.13 | length 20
  Top Layer w0.203: v1@86.385,4.293 v1(86.385,4.42) R5.2@86.385,5.283
  Top Layer w0.254: U21.13@75.424,13.161 76.882,13.161 77.165,12.878 77.165,12.04 v1(76.987,11.862)
  Bottom Layer w0.254: v1(76.987,11.862) 76.606,11.481 76.606,7.621 76.988,7.239 78.334,7.239 80.721,4.851 83.211,4.851 84.329,3.734 85.7,3.734 v1(86.385,4.42)
USIM_DATA: R4.1 U21.11 | length 24.4
  Top Layer w0.254: U21.11@74.619,15.361 U21.11@75.424,15.361 v1@77.146,15.361 ; v1(86.792,3.302) 87.147,3.658 R4.1@87.935,3.658
  Bottom Layer w0.254: v1(77.216,15.291) 77.216,13.437 76.175,12.395 76.175,7.442 76.81,6.807 78.155,6.807 80.542,4.42 83.033,4.42 84.15,3.302 v1(86.792,3.302)
USIM_GND: C11.2 C12.2 C19.2 C20.2 C21.2 SIM1.1 U21.10 | length 41.5
  Top Layer w0.508: U21.10@76.424,16.461 v1@78.23,16.461 ; C12.2@87.859,5.296 89.306,5.296 89.306,3.772 C21.2@89.408,3.671 90.513,3.671 90.896,3.287 SIM1.1@90.896,1.772 ; v1(88.544,12.014) 89.586,12.014 90.309,11.291 C19.2@91.939,11.291 ; 90.69,11.265 C20.2@93.412,11.265 95.161,11.265 v1(95.402,11.024)
  Bottom Layer w0.508: v1(78.181,16.485) 78.334,16.485 80.188,14.63 80.188,12.929 81.102,12.014 v1(88.544,12.014) ; v1(89.332,4.47) 89.332,7.595 89.941,8.204 92.052,8.204 92.459,8.611 94.818,8.611 95.402,9.195 v1(95.402,11.024)
USIM_RST: R6.2 U21.12 | length 25
  Top Layer w0.254: U21.12@76.424,14.261 v1@78.804,14.261 ; R6.2@94.818,14.249 v1@95.783,14.249
  Bottom Layer w0.254: v1(78.867,14.199) 78.918,14.199 79.629,13.487 79.629,11.58 80.083,11.125 91.618,11.125 91.872,11.379 91.872,13.621 92.348,14.097 95.529,14.097 95.555,14.072
  other v1: 95.783,14.3
USIM_VDD: C11.1 C12.1 SIM1.8 U21.14 | length 21
  Top Layer w0.381: SIM1.8@90.896,7.406 SIM1.8@90.896,7.772 SIM1.8@90.896,7.95
  Top Layer w0.508: v1(77.749,9.576) 78.435,9.576 78.674,9.815 U21.14@78.674,11.161 ; v1(88.519,10.262) 88.519,9.169 87.859,8.509 C12.1@87.859,6.997 89.306,6.997 C11.1@89.357,6.947 90.436,6.947 SIM1.8@90.896,7.406
  Bottom Layer w0.508: v1(77.749,9.576) 78.715,10.541 88.24,10.541 v1(88.519,10.262)
VDD_EXT_3V: C25.1 R106.1 U21.24 | length 23.7
  Top Layer w0.508: R106.1@78.994,6.528 R106.1@78.918,6.604 79.705,6.604 v1(79.934,6.833) ; U21.24@90.724,14.261 C25.1@93.258,14.261 ; v1@92.659,13.284 v1(92.685,13.284) 93.04,13.284 93.336,13.58 C25.1@93.336,14.339
  Bottom Layer w0.508: v1(79.934,6.833) 79.934,8.89 80.899,9.855 87.596,9.855 88.13,9.322 89.205,9.322 90.449,10.566 92.227,10.566 92.685,11.024 v1(92.685,13.284)
VIN: J4.1 Q13.2 R10.2 R80.1 R81.1 TP1.1 | length 57.9
  Top Layer w0.508: v1@1.321,21.285 R10.2@1.321,22.377 Q13.2@2.676,22.377 ; v1(5.334,16.84) 5.74,16.434 13.848,16.434 16.541,13.741 19.152,13.741 23.851,9.042 v1(23.851,7.671)
  Top Layer w1.27: J4.1@33.503,6.509 TP1.1@33.503,10.268 33.511,10.26 33.511,8.865 33.765,9.119 R80.1@35.89,9.119 35.89,10.998 36.932,12.04 R81.1@38.202,12.04
  Bottom Layer w0.508: v1(1.397,21.209) 3.708,21.209 5.334,19.583 v1(5.334,16.84) ; v1(23.851,7.671) 23.927,7.595 34.366,7.595 R80.1@35.89,9.119
VIN_ADC: C51.2 R9.2 R56.1 U9.53 | length 32.6
  Top Layer w0.254: R56.1@2.159,17.932 2.159,18.923 2.4,19.164 C51.2@3.632,19.164 5.118,19.164 R9.2@5.156,19.126 5.969,19.126 6.375,19.533 v1(6.375,21.717) ; v1(29.007,23.393) 29.187,23.574 U9.53@30.548,23.574
  Bottom Layer w0.254: v1(6.375,21.717) 7.493,22.835 28.448,22.835 v1(29.007,23.393)
VIN_N: C7.1 C14.1 C47.1 C57.1 D2.2 D11.2 R30.1 R50.1 U2.2 U4.2 | length 47.8
  Top Layer w1.27: D2.2@40.411,11.839 R30.1@42.42,11.839 ; R30.1@42.57,11.989 43.688,10.871 U2.2@46.75,10.871 ; C7.1@44.552,10.91 U2.2@48.927,10.91 ; U2.2@49.015,10.871 49.015,13.945 47.79,15.17 D11.2@47.79,17.577 47.79,17.97 50.851,21.031 50.851,26.34 ; C14.1@50.851,29.718 50.851,26.34 ; R50.1@59.538,24.79 59.538,26.899 ; U4.2@61.843,29.706 C47.1@59.538,29.706 59.538,26.899 ; 50.851,26.34 57.76,26.34 58.318,26.899 59.538,26.899
X1: S2.1 U9.59 | length 36.4
  Top Layer w0.254: v1(8.179,21.946) v1@8.331,21.946 ; v1@8.331,22.098 S2.1@8.331,23.571 ; U9.59@30.548,20.574 32.264,20.574 33.56,21.869 34.398,21.869 35.077,22.549 35.077,23.222 34.722,23.578 v1(34.722,24.181)
  Bottom Layer w0.254: v1(8.179,21.946) 9.5,21.946 9.957,22.403 30.56,22.403 32.008,23.851 34.392,23.851 v1(34.722,24.181) ; v1@34.722,24.13 v1@34.874,24.13
XT1: C42.1 U9.61 Y2.1 | length 10.8
  Top Layer w0.254: Y2.1@24.764,14.415 25.653,14.415 26.024,14.786 C42.1@26.588,14.786 31.652,14.786 32.398,15.532 U9.61@32.398,18.224
XT2: C41.2 U9.60 Y2.2 | length 9
  Top Layer w0.254: Y2.2@24.764,16.915 25.589,16.915 26.019,16.484 C41.2@26.588,16.484 28.473,16.484 28.931,16.942 28.931,19.617 29.388,20.074 U9.60@30.548,20.074
pads on no net: MARK1.0 MARK1.1 MARK2.0 MARK2.1 SIM1.4 SIM1.5 U9.1 U9.5 U9.20 U9.40 U9.41 U9.47 U9.50 U9.54 U9.57 U9.58 U9.70 U9.71 U9.72 U9.73 U9.74 U9.75 U21.2 U21.3 U21.4 U21.5 U21.6 U21.7 U21.8 U21.9 U21.16 U21.19 U21.20 U21.21 U21.22 U21.23 U21.25 U21.26 U21.28 U21.29 U21.30 U21.31 U21.32 U21.33 U21.44 U21.45 U21.46 U21.47 U21.48 U21.49 U21.50 U21.51 U21.52 U21.53 U21.54 U21.55 U21.56 U21.57 U21.58

## Polygon pours and split planes (outlines as drawn)
GND on Top Layer "TopLayer-gnd" (solid, remove dead copper, pour order 4): -20.185,40.069 98.806,40.069 98.806,-4.536 97.384,-4.536 -20.185,-4.536
GND on Bottom Layer "BottomLayer-gnd" (solid, remove dead copper, pour order 3): -20.185,40.069 98.806,40.069 98.806,-4.536 97.384,-4.536 96.876,-4.547 -20.185,-4.547

## Keep-outs
Keep-Out Layer:
  circle w0.013: c0,-0.001 r1.6
  circle w0.013: c79.765,-0.001 r1.6
  circle w0.013: c69.765,22.999 r1.6
  circle w0.127: c-5.472,7.699 r0.457
  circle w0.127: c-5.472,141.5 r0.457
  circle w0.013: c69.765,156.799 r1.6
  circle w0.013: c79.765,133.799 r1.6
  circle w0.013: c0,133.799 r1.6
  circle w0.127: c-5.472,96.9 r0.457
  circle w0.013: c69.765,112.199 r1.6
  circle w0.013: c79.765,89.199 r1.6
  circle w0.013: c0,89.199 r1.6
  circle w0.127: c-5.472,52.299 r0.457
  circle w0.013: c69.765,67.599 r1.6
  circle w0.013: c79.765,44.599 r1.6
  circle w0.013: c0,44.599 r1.6
  lines w0.013: -23.185,0.069 -23.185,40.069 -23.185,173.869 ; -23.185,0.076 -23.185,-2.931 -20.185,-2.931 -20.185,40.069 ; -23.185,46.59 -23.185,86.59 ; -23.185,93.11 -23.185,133.11 ; -23.185,136.631 -23.185,139.638 ; -23.185,139.631 -23.185,173.869 ; -23.179,173.869 -20.185,173.869 ; -23.165,173.869 -23.185,173.869 ; -20.185,41.669 -20.185,84.669 ; -20.185,43.6 -20.185,86.59 ; -20.185,43.625 -20.185,40.069 ; -20.185,46.59 -20.185,86.59 ; -20.185,46.622 -20.185,40.069 ; -20.185,86.269 -20.185,129.269 ; -20.185,90.12 -20.185,133.11 ; -20.185,90.146 -20.185,86.59 ; -20.185,93.11 -20.185,133.11 ; -20.185,93.143 -20.185,86.59 ; -20.185,130.869 -20.185,173.869 ; -20.185,136.641 -20.185,173.869 ; -20.185,136.666 -20.185,133.11 ; -20.185,139.631 -20.185,173.869 ; -20.185,139.663 -20.185,133.11 ; 98.815,0.076 98.815,-2.931 101.815,-2.931 ; 98.815,41.669 98.815,44.676 ; 98.815,46.59 98.815,86.59 ; 98.815,86.269 98.815,89.276 ; 98.815,93.11 98.815,133.11 ; 98.815,130.869 98.815,133.876 ; 98.815,136.631 98.815,139.638 ; 98.815,139.631 98.815,173.869 ; 101.815,-2.921 101.815,40.069 101.815,43.625 ; 101.815,43.6 101.815,86.59 101.815,90.146 ; 101.815,90.12 101.815,133.11 101.815,136.666 ; 101.815,136.641 101.815,173.869 98.815,173.869 ; -20.185,0.069 ccw(c-17.185,0.069) -17.185,-2.931 6.528,-2.931 26.187,-2.931 95.815,-2.931 ccw(c95.815,0.069) 98.815,0.069 98.815,40.069 ; -20.185,0.069 -20.185,40.069 ; -20.185,0.069 -20.185,40.069 ; -20.185,0.069 -20.185,40.069 ; -20.185,0.069 -20.185,40.069 ; -20.185,0.069 -20.185,40.069 ; -20.185,0.069 -20.185,40.069 ; -20.185,0.069 -20.185,40.069 ; -20.185,0.069 -20.185,40.069 ; -20.185,0.069 -20.185,40.069 ; -20.185,40.069 98.815,40.069 ; -20.185,44.669 ccw(c-17.185,44.669) -17.185,41.669 6.528,41.669 26.187,41.669 95.815,41.669 ccw(c95.815,44.669) 98.815,44.669 ; -20.185,44.669 -20.185,84.669 ; -20.185,44.669 -20.185,84.669 ; -20.185,44.669 -20.185,84.669 ; -20.185,84.669 98.815,84.669 ; -20.185,89.269 ccw(c-17.185,89.269) -17.185,86.269 6.528,86.269 26.187,86.269 95.815,86.269 ccw(c95.815,89.269) 98.815,89.269 ; -20.185,89.269 -20.185,129.269 ; -20.185,89.269 -20.185,129.269 ; -20.185,89.269 -20.185,129.269 ; -20.185,129.269 98.815,129.269 ; -20.185,133.869 ccw(c-17.185,133.869) -17.185,130.869 6.528,130.869 26.187,130.869 95.815,130.869 ccw(c95.815,133.869) 98.815,133.869 ; -20.185,133.869 -20.185,173.869 ; -20.185,133.869 -20.185,173.869 ; -20.185,133.869 -20.185,173.869 ; -20.185,173.869 98.815,173.869 ; 98.815,40.069 98.815,173.869 ; 98.815,44.669 98.815,84.669 ; 98.815,44.669 98.815,84.669 ; 98.815,44.669 98.815,84.669 ; 98.815,89.269 98.815,129.269 ; 98.815,89.269 98.815,129.269 ; 98.815,89.269 98.815,129.269 ; 98.815,133.869 98.815,173.869 ; 98.815,133.869 98.815,173.869 ; 98.815,133.869 98.815,173.869

## Other copper
Top Layer:
  rectangle net 3.3V: 34.747,15.316 36.347,16.739
  rectangle net 3.6V: 25.273,6.172 27.026,11.328
  rectangle net 5V: 29.54,11.354 31.191,13.106
  rectangle net SLEEP: 65.38,15.138 67.513,15.977
  rectangle net 5V: 61.976,16.993 64.237,18.263
  rectangle net 5V: 63.475,15.672 63.983,17.551
  rectangle net GPRS_3.6V: 79.375,27 81.28,29.82
  rectangle net NetC6_1: 50.546,6.248 53.518,7.747
  rectangle net NetD2_1: 37.465,6.858 40.411,9.779
  rectangle net 5V: 47.6,6.248 49.047,9.195
  rectangle net 5V: 51.943,12.217 54.559,14.097
  pour cut-out: 23.827,13.716 23.827,17.526 25.631,17.526 25.656,17.501 25.656,13.716
  pour cut-out: 67.025,23.115 ccw(c69.775,23.115) 69.775,20.365 ccw(c69.775,23.115) 72.525,23.115 ccw(c69.775,23.115) 69.775,25.865 ccw(c69.775,23.115)
  pour cut-out: 77.05,0.069 ccw(c79.8,0.069) 79.8,-2.681 ccw(c79.8,0.069) 82.55,0.069 ccw(c79.8,0.069) 79.8,2.819 ccw(c79.8,0.069)
  pour cut-out: -2.673,0.052 ccw(c0.077,0.052) 0.077,-2.698 ccw(c0.077,0.052) 2.827,0.052 ccw(c0.077,0.052) 0.077,2.802 ccw(c0.077,0.052)
Bottom Layer:
  rectangle net 3.6V: 25.222,8.331 28.448,9.601
  rectangle net 5V: 62.027,16.84 63.221,18.186
  rectangle net NetC6_1: 52.197,6.35 53.543,7.518
  rectangle net NetD2_1: 38.862,7.036 40.437,8.458
  rectangle net 5V: 29.642,11.709 31.242,13.208
  pour cut-out: 67.037,23.09 ccw(c69.787,23.09) 69.787,20.34 ccw(c69.787,23.09) 72.537,23.09 ccw(c69.787,23.09) 69.787,25.84 ccw(c69.787,23.09)
  pour cut-out: 77.007,0.052 ccw(c79.757,0.052) 79.757,-2.698 ccw(c79.757,0.052) 82.507,0.052 ccw(c79.757,0.052) 79.757,2.802 ccw(c79.757,0.052)
  pour cut-out: -2.698,0.052 ccw(c0.052,0.052) 0.052,-2.698 ccw(c0.052,0.052) 2.802,0.052 ccw(c0.052,0.052) 0.052,2.802 ccw(c0.052,0.052)

## Silkscreen, mask and mechanical layers (free items; w line width, h text height)
Top Overlay:
  lines w0.508: 74.904,29.569 74.913,29.569
  text "119" at 76.429,2.896 h2.54
  text "备电" at 26.797,-2.464 h2.54 r90
  text "主电" at 24.562,-2.642 h2.54 r90
  text "阀门" at 50.089,-2.642 h2.03
Bottom Overlay:
  text "RX" at 89.916,36.195 h0.86
  text "GND" at 85.242,36.119 h0.86
  text "TX" at 87.351,36.093 h0.86
  text "WX0.012.610PCB-4.2" at 96.307,21.3 h1
  text "102010402-0264" at 96.307,19.721 h1
  text "2026-1-23" at 96.307,18.142 h1
  text "V" at -17.975,16.749 h0.86
  text "WLWn-P97" at 96.257,16.681 h1
  text "G" at -17.975,15.649 h0.86
  text "I" at -18.375,15.349 h0.86 r180
  text "V1" at 96.23,15.204 h1
  text "C" at -17.975,13.349 h0.86
  text "R" at -17.975,12.149 h0.86
  text "G" at -15.457,11.846 h0.86
  text "R" at -15.457,10.746 h0.86
  text "T" at -15.457,9.746 h0.86
  text "S" at -15.447,8.646 h0.86
  text "黑" at 18.999,6.477 h2.54
  text "白" at 13.919,6.426 h2.54
Mechanical 5:
  circle w0.006: c-6.86,24.545 r0.003
  circle w0.006: c-3.19,21.453 r0.003

## Text inside footprints (layer, text, board x,y; h text height)
C6: Top Overlay "+" at 21.246,7.42 h0.86
C44: Top Overlay "+" at 12.546,7.42 h0.86
LCD1: Bottom Overlay "1" at 13.298,35.882 h1.65; Bottom Overlay "25" at 68.826,35.882 h1.65